# EAGLE board garw_joystick (EAGLE 9.2.2)
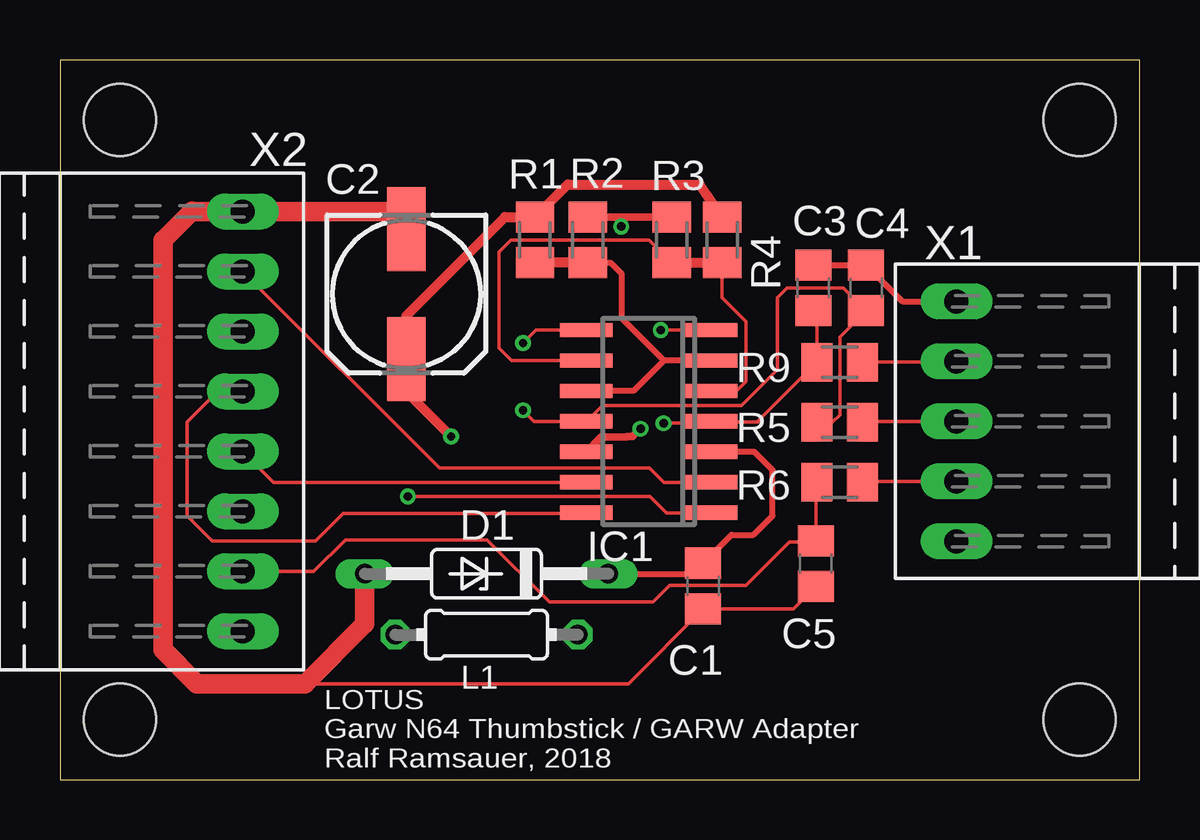
[diagram p0: board, top side]
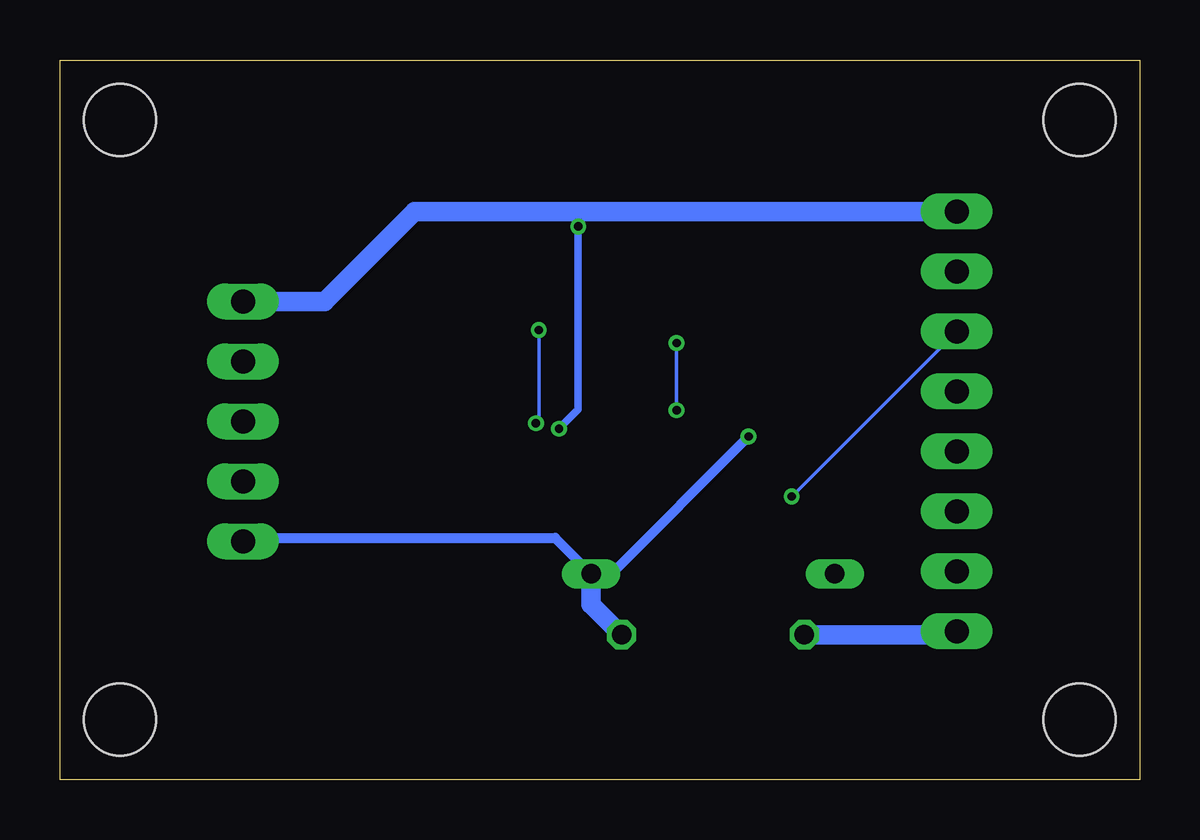
[diagram p1: board, bottom side, seen from below]

Size 45 x 30 mm. Coordinates in mm from the lower left corner, seen from the top.
Outline: 0,0 45,0 45,30 0,30 0,0
Copper layers (1*16): Top 0.035mm / dielectric 1.6mm / Bottom 0.035mm
Design rules "Elecrow_2-layer_PCB_eagle_rule": minimum track width 6mil, minimum drill 12mil, track to track 6mil, track to pad 8mil, pad to pad 12mil, via to via 12mil, smd to smd 0mil, copper to edge 20mil, drill to drill 10mil, minimum pad ring 6mil, minimum via ring 6mil, stop-mask expansion 0mil, vias tented up to drill 100mil, thermal gap 10mil
Holes 3 mm at 42.5,27.5 42.5,2.5 2.5,2.5 2.5,27.5

## Footprints (pad centres in the part's own frame; a part is rotated, then mirrored left to right if it is on the bottom)
C0805 = smd 1.3 x 1.5: 1 -0.95,0; 2 0.95,0
153CLV-0605 = smd 3.5 x 1.6: + 2.7,0; - -2.7,0
DO35Z10 = drill 0.813 long: A 5.08,0; C -5.08,0
SO14 = smd 0.6 x 2.2: 1 -3.81,-2.6; 2 -2.54,-2.6; 3 -1.27,-2.6; 4 0,-2.6; 5 1.27,-2.6; 6 2.54,-2.6; 7 3.81,-2.6; 8 3.81,2.6; 9 2.54,2.6; 10 1.27,2.6; 11 0,2.6; 12 -1.27,2.6; 13 -2.54,2.6; 14 -3.81,2.6
0204/7 = drill 0.813 octagon: 1 -3.81,0; 2 3.81,0
M0805 = smd 1.3 x 1.6: 1 -0.95,0; 2 0.95,0
PS-05_WL = drill 1 long: 01 -5,0; 02 -2.5,0; 03 0,0; 04 2.5,0; 05 5,0
PS-08_WL = drill 1 long: 01 -8.75,0; 02 -6.25,0; 03 -3.75,0; 04 -1.25,0; 05 1.25,0; 06 3.75,0; 07 6.25,0; 08 8.75,0

## Placement (x,y rotation side)
C1  100n  [C0805]  26.81,8.07 270 top
C2  100µ/25V  [153CLV-0605]  14.44,20.24 270 top
C3  100n  [C0805]  31.4,20.5 270 top
C4  100n  [C0805]  33.6,20.5 270 top
C5  100n  [C0805]  31.5,9 90 top
D1  1N5353  [DO35Z10]  17.78,8.58 180 top
IC1  TLC339D  [SO14]  24.54,14.93 90 top
L1  47µ  [0204/7]  17.78,6.04 0 top
R1  1k3  [M0805]  19.8,22.5 90 top
R2  22k  [M0805]  22,22.5 270 top
R3  1k3  [M0805]  25.5,22.5 270 top
R4  22k  [M0805]  27.6,22.5 90 top
R5  [M0805]  32.5,14.9 180 top
R6  10k  [M0805]  32.5,12.4 180 top
R9  [M0805]  32.5,17.4 180 top
X1  PS-05_WL  [PS-05_WL]  37.37,14.93 90 top
X2  PS-08_WL  [PS-08_WL]  7.62,14.93 270 top

## Library data of the parts
C1-C5 = rcl; SPICEPREFIX: C
D1 = diode
IC1 = linear
L1 = rcl; SPICEPREFIX: L
R1-R6 R9 = rcl; SPICEPREFIX: R
X1 X2 = _TEC_Reichelt-PS_r630

## Nets
0V67: IC1.5 IC1.9 R3.2 R4.1
11V33: IC1.6 IC1.10 R1.1 R2.2
CAR_VCC: L1.1 X2.08
GARW1: IC1.2 X2.02
GARW2: IC1.1 X2.03
GARW3: IC1.14 X2.04
GARW4: IC1.13 X2.05
GARW_LAP: C5.2 R6.2 X2.07
GND: C1.2 C2.- C3.1 C4.1 C5.1 D1.A IC1.12 R2.1 R3.1 X1.05 X2.01
JOY1: R9.1 X1.04
JOY2: R5.1 X1.03
N$1: R6.1 X1.02
N$5: C4.2 IC1.8 IC1.11 R5.2
N$8: C3.2 IC1.4 IC1.7 R9.2
VCC: C1.1 C2.+ D1.C IC1.3 L1.2 R1.2 R4.2 X1.01

## Tracks (layer width: path | path; a pad name or v marks a point on that pad's centre or on a via)
0V67
  Top 0.152: R3.2 24.55,22.5 18.8,22.5 18.3,22 18.3,18 18.83,17.47 IC1.9 | IC1.5 28.2,16.2 28.6,16.6 28.6,19.1 27.6,20.1 R4.1
  Top 0.406: R3.2 R4.1
11V33
  Top 0.254: IC1.10 23.9,16.2 25.17,17.47 | IC1.6 25.17,17.47 | 25.17,17.47 23.4,19.24 23.4,21.1 22.95,21.55 R2.2
  Top 0.406: R2.2 R1.1
CAR_VCC
  Bottom 0.813: X2.08 7.76,6.04 L1.1
GARW1
  Top 0.152: IC1.2 25.18,12.39 24.58,12.98 15.82,12.98 X2.02
GARW2  (via drill 0.35)
  Top 0.152: v14.5,11.8 24.6,11.8 25.28,11.12 IC1.1
  Bottom 0.152: X2.03 v14.5,11.8
GARW3
  Top 0.152: X2.04 6.58,16.18 5.3,14.9 5.3,11 6.35,9.95 10.65,9.95 11.8,11.1 21.92,11.1 IC1.14
GARW4
  Top 0.152: X2.05 8.91,12.39 IC1.13
GARW_LAP
  Top 0.152: X2.07 10.58,8.68 11.9,10 17.8,10 20.4,7.4 24.72,7.4 25.41,8.09 28.59,8.09 30.4,9.9 31.45,9.9 C5.2 31.5,12.35 R6.2
GND  (via drill 0.35)
  Top 0.152: C5.1 30.57,7.12 C1.2 23.69,4 10.22,4
  Top 0.254: C3.1 C4.1 35.12,19.93 X1.05
  Top 0.305: IC1.12 22.55,14.27 23.62,14.27 23.64,14.29 23.87,14.29 v24.2,14.62 | R2.1 23.4,23.45 | 23.4,23.45 25.4,23.45 25.45,23.5 | 23.4,23.45 v23.4,23.06
  Top 0.508: 25.45,23.5 R3.1
  Top 0.813: C2.- 13.7,23.68 X2.01 5.52,23.68 5.5,23.7 4.3,22.5 4.3,5.4 5.7,4 10.22,4 12.7,6.48 D1.A
  Bottom 0.305: v24.2,14.62 24.2,14.63 23.4,15.44 v23.4,23.06 23.4,23.68
  Bottom 0.813: X2.01 23.4,23.68 30.22,23.68 33.97,19.93 X1.05
JOY1
  Top 0.152: X1.04 37.34,17.4 R9.1
JOY2
  Top 0.152: X1.03 33.48,14.93 R5.1
N$1
  Top 0.152: X1.02 33.48,12.43 R6.1
N$5  (via drill 0.35)
  Top 0.152: R5.2 32.2,14.9 32.5,15.2 32.5,18.45 C4.2 32.65,20.5 30.3,20.5 29.9,20.1 29.9,17.1 28.4,15.6 22.61,15.6 IC1.11 19.77,14.93 v19.3,15.4 | IC1.8 19.84,18.74 v19.3,18.2
  Bottom 0.152: v19.3,18.2 v19.3,15.4
N$8  (via drill 0.35)
  Top 0.152: IC1.7 v25.04,18.74 | v25.16,14.86 27,14.86 | 27,14.86 27.07,14.86 IC1.4 | C3.2 31.55,19.4 R9.2 29.1,14.95 29.1,14.9 27.04,14.9 27,14.86
  Bottom 0.152: v25.04,18.74 25.04,14.86 v25.16,14.86
VCC  (via drill 0.35)
  Top 0.152: 26.37,8.58 C1.1
  Top 0.254: C1.1 27.99,10.2 28.9,10.2 29.7,11 29.7,12.9 28.94,13.66 IC1.3 | D1.C 26.37,8.58
  Top 0.406: R4.2 26.66,24.81 21.16,24.81 R1.2 18.55,23.45 14.44,19.34 C2.+ 14.44,16.16 v16.3,14.3
  Bottom 0.406: v16.3,14.3 22.02,8.58 D1.C 24.36,10.08 37.22,10.08 X1.01
  Bottom 0.813: L1.2 22.86,7.31 D1.C

## Text on the board
tNames: LOTUS / Garw N64 Thumbstick / GARW Adapter / Ralf Ramsauer, 2018